# Altium PCB PCB2.PcbDoc
Units mil, origin at the board's own origin, x right, y up, seen from the top; angles counter-clockwise.
Board outline 11815 x 4930 mil, 2 copper layers (Top Layer, Bottom Layer); 72 components, 38 nets, 176 pads, 4 vias.
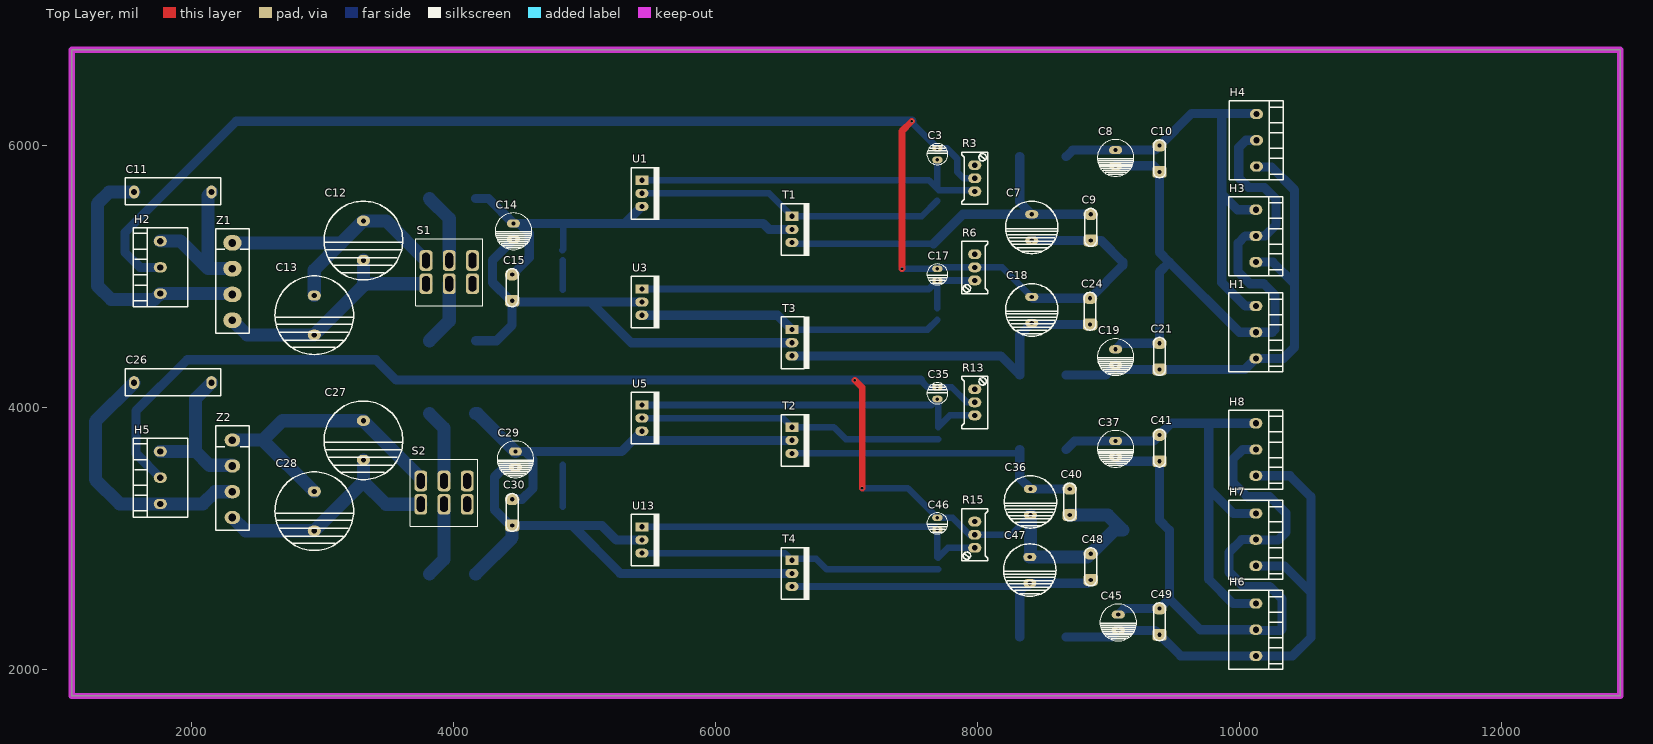
[diagram p0: Top Layer view]
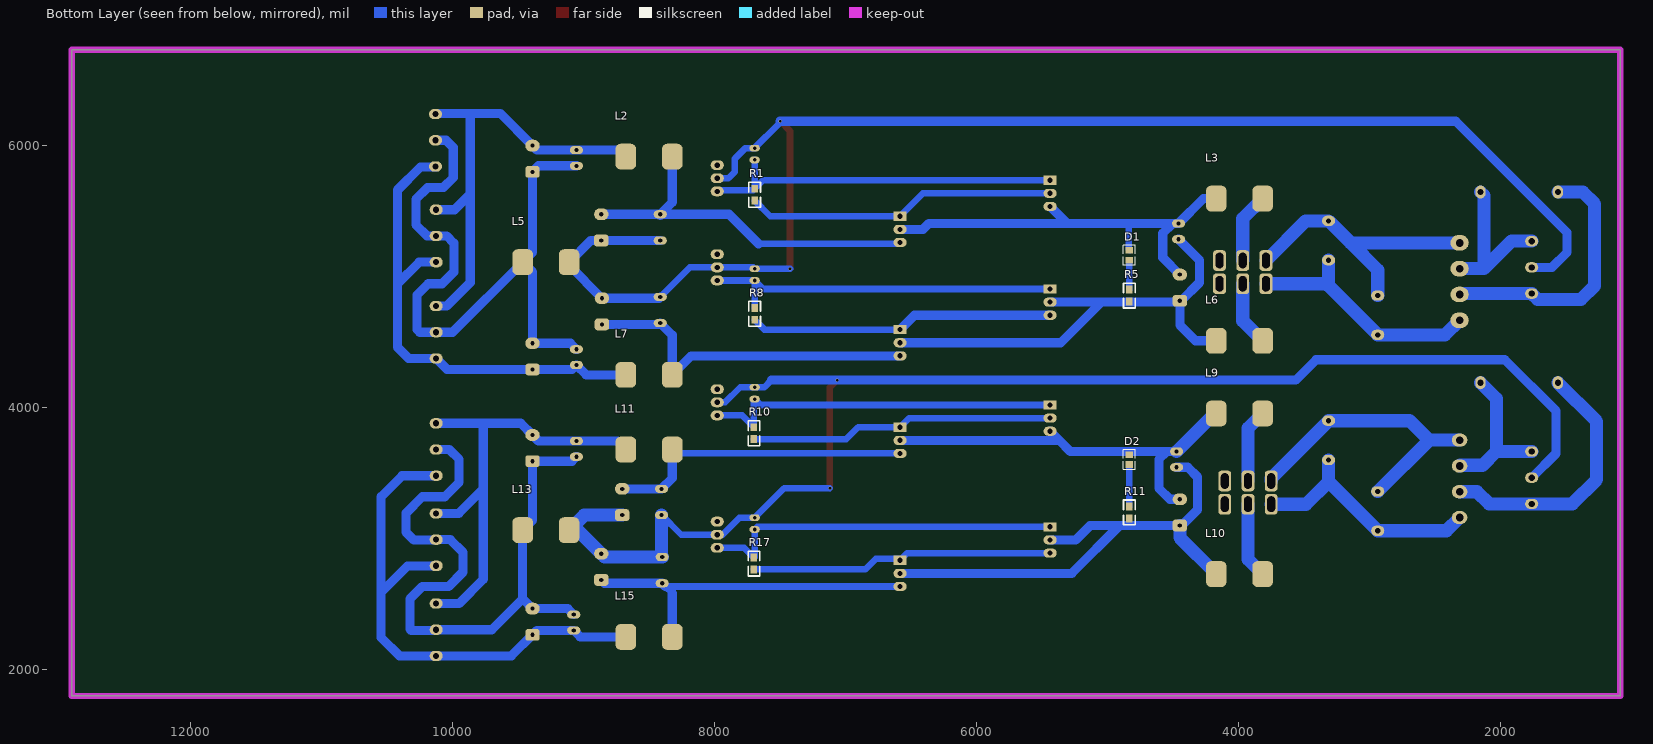
[diagram p1: Bottom Layer view, seen from below]

## Layer stack, top to bottom
Top Solder: solder mask 0.4, Solder Resist, Dk 3.5
Top Layer: signal copper 1.4
Dielectric 1: dielectric 12.6, FR-4, Dk 4.8
Bottom Layer: signal copper 1.4
Bottom Solder: solder mask 0.4, Solder Resist, Dk 3.5

## Board outline
1090,1800 1090,6730 12905,6730 12905,1800

## Design rules (kind name [scope] priority, off if disabled: settings)
Clearance [All] p1: gap=10
PolygonConnect [All] p1: connectstyle=Relief reliefconductorwidth=10 reliefentries=4 polygonreliefangle="90 Angle" airgapwidth=10
RoutingVias [All] p1: holewidth=28 width=50 viastyle="Through Hole" minholewidth=28 minwidth=50 maxholewidth=28 maxwidth=50
SolderMaskExpansion [All] p1: expansion=4
Width [All] p1: maxlimit=100 minlimit=10 preferedwidth=10
30 further rules are at their usual default settings.

## Components (designator, comment, footprint, x,y, rotation, side; value= is the part's Value field where it differs from the comment)
C3 "Cap-AL" CD-2.2mm 7695,5890 r270 top
C7 "470uf" CD-5mm 8415,5475 r90 top
C8 "22uf" CD-3mm 9055,5965 r90 top
C9 "Cap-SEMI" 独石电容 8865,5275 r0 top
C10 "Cap-SEMI" 独石电容 9390,5799 r0 top
C11 "Cap1" 安规电容 1565,5645 r270 top
C12 "2200uf" CD-7.6mm 3315,5425 r90 top
C13 "2200uf" CD-7.6mm 2940,4855 r90 top
C14 "Cap-AL" CD-3mm 4460,5405 r90 top
C15 "0.1uf" 独石电容 4450,4815 r0 top
C17 "Cap-AL" CD-2.2mm 7695,5060 r90 top
C18 "470uf" CD-5mm 8415,4845 r90 top
C19 "22uf" CD-3mm 9055,4445 r90 top
C21 "Cap-SEMI" 独石电容 9390,4291 r0 top
C24 "Cap-SEMI" 独石电容 8860,4635 r0 top
C26 "Cap1" 安规电容 1565,4190 r270 top
C27 "2200uf" CD-7.6mm 3315,3900 r90 top
C28 "2200uf" CD-7.6mm 2940,3360 r90 top
C29 "Cap-AL" CD-3mm 4475,3665 r90 top
C30 "0.1uf" 独石电容 4450,3100 r0 top
C35 "Cap-AL" CD-2.2mm 7695,4065 r270 top
C36 "470uf" CD-5mm 8405,3380 r90 top
C37 "22uf" CD-3mm 9055,3745 r90 top
C40 "Cap-SEMI" 独石电容 8705,3180 r0 top
C41 "Cap-SEMI" 独石电容 9390,3591 r0 top
C45 "22uf" CD-3mm 9075,2420 r90 top
C46 "Cap-AL" CD-2.2mm 7695,3160 r90 top
C47 "470uf" CD-5mm 8400,2860 r90 top
C48 "Cap-SEMI" 独石电容 8865,2685 r0 top
C49 "Cap-SEMI" 独石电容 9390,2266 r0 top
D1 "LED" 0805_s 4823.22,5141.73 r270 bottom
D2 "LED" 0805_s 4823.22,3581.93 r270 bottom
H1 "KF128-5.08-3P" KF128-5.08-3P 10125,4775 r90 top
H2 "KF128-5.08-3P" KF128-5.08-3P 1765,4870 r270 top
H3 "KF128-5.08-3P" KF128-5.08-3P 10125,5510 r90 top
H4 "KF128-5.08-3P" KF128-5.08-3P 10130,6240 r90 top
H5 "KF128-5.08-3P" KF128-5.08-3P 1765,3265 r270 top
H6 "KF128-5.08-3P" KF128-5.08-3P 10125,2505 r90 top
H7 "KF128-5.08-3P" KF128-5.08-3P 10125,3192.5 r90 top
H8 "KF128-5.08-3P" KF128-5.08-3P 10125,3880 r90 top
L2 "SMD" "功率电感-12x12 - duplicate" 8500,5915 r0 bottom
L3 "SMD" "功率电感-12x12 - duplicate" 3995,5595 r0 bottom
L5 "SMD" "功率电感-12x12 - duplicate" 9287.83,5110 r0 bottom
L6 "SMD" "功率电感-12x12 - duplicate" 3995,4510 r0 bottom
L7 "SMD" "功率电感-12x12 - duplicate" 8500,4250 r0 bottom
L9 "SMD" "功率电感-12x12 - duplicate" 3995,3955 r0 bottom
L10 "SMD" "功率电感-12x12 - duplicate" 3995,2730 r0 bottom
L11 "SMD" "功率电感-12x12 - duplicate" 8500,3680 r0 bottom
L13 "SMD" "功率电感-12x12 - duplicate" 9287.83,3065 r0 bottom
L15 "SMD" "功率电感-12x12 - duplicate" 8500,2250 r0 bottom
R1 "RES" 0805 7695,5670 r270 bottom
R3 "可调电位器1" 电位器 7980,5850 r270 top
R5 "RES" 0805 4835,4810 r90 bottom
R6 "可调电位器1" 电位器 7980,4970 r90 top
R8 "RES" 0805 7695,4670 r90 bottom
R10 "RES" 0805 7700,3850 r270 bottom
R11 "RES" 0805 4835,3155 r90 bottom
R13 "可调电位器1" 电位器 7980,4140 r270 top
R15 "可调电位器1" 电位器 7980,2930 r90 top
R17 "RES" 0805 7700,2765 r90 bottom
S1 "双掷开关" SWITCH 3792.83,5122.17 r0 top
S2 "双掷开关" SWITCH 4107.17,3262.83 r180 top
T1 "TIP41" TO-220 6585,5460 r270 top
T2 "TIP41" TO-220 6585,3850 r270 top
T3 "TIP42" TO-220 6585,4595 r270 top
T4 "TIP42" TO-220 6585,2835 r270 top
U1 "LM317" TO-220 5440,5735 r270 top
U3 "LM337" TO-220 5440,4905 r270 top
U5 "LM317" TO-220 5440,4020 r270 top
U13 "LM337" TO-220 5440,3090 r270 top
Z1 "整流桥" 整流桥#1 2315,5256.85 r0 top
Z2 "整流桥" 整流桥#2 2315,3751.85 r0 top

## Footprints (in the part's own frame and the unit in brackets; to place one, negate y for a bottom-side part, rotate by r counter-clockwise, add the part's x,y. Pads: shape width x height; smd on the part's side, far side on the other; paste and mask are expansions set on the pad)
0805 [mil]
  rect 60x50 smd: 1(0,0) 2(90,0)
  silkscreen extent -50,-45 140,45
0805_s [mm]
  rect 1.3x1.499 smd: 1(0.425,-0.35) 2(-1.475,-0.35)
  silkscreen extent -2.47,-1.49 1.43,0.79
CD-2.2mm [mm]
  oval 1.3x2.032 hole 0.7: 1(0,0) 2(-2.286,0)
  silkscreen extent -3.16,-2.04 0.92,2.04
CD-3mm [mil]
  oval 62x100 hole 31.5: 1(0,0) 2(-120,0)
  silkscreen extent -200,-140 80,140
CD-5mm [mil]
  oval 62x100 hole 31.5: 1(0,0) 2(-200,0)
  silkscreen extent -300,-200 100,200
CD-7.6mm [mm]
  oval 2x2.54 hole 1: 1(0,0) 2(-7.62,0)
  silkscreen extent -11.43,-7.62 3.81,7.62
KF128-5.08-3P [mm]
  oval 2x2.54 hole 1.2: 1(0,0) 2(-5.08,0) 3(-10.16,0)
  silkscreen extent -12.76,-5.2 2.54,5.3, body extent -12.66,-5.1 2.34,5.2, height 14.1
SWITCH [mm]
  rrect50% 2.5x4 hole 1.5 slot 3 at 90 deg: 1(0,0) 2(4.5,0) 3(9,0) 4(9,-4.5) 5(4.5,-4.5) 6(0,-4.5)
  silkscreen extent -2,-8.75 11,4.25, body extent -1.85,-8.18 10.85,3.63, height 30.58
TO-220 [mil]
  rect 70x100 hole 40: 1(0,0)
  oval 70x100 hole 40: 2(100,0) 3(200,0)
  silkscreen extent -102,-80 302,135
"功率电感-12x12 - duplicate" [mm]
  rrect50% 4x5 smd: 1(-4.5,0) 2(4.5,0)
  body extent -6.08,-6.15 6.21,6.15, height 8
安规电容 [mm]
  oval 2.54x2 hole 1.2: 1(0,0) 2(0,15)
  silkscreen extent -2.75,-1.75 2.5,16.75, body extent -2.75,-1.75 2.6,16.75, height 13
整流桥#1 [mm]
  oval 3.556x3 hole 1.5: 1(0,0) 2(0,-5) 3(0,-10) 4(0,-15)
  silkscreen extent -3.25,-17.5 3.25,2.75
整流桥#2 [mm]
  oval 3x2.54 hole 1.5: 1(0,0) 2(0,-5) 3(0,-10) 4(0,-15)
  silkscreen extent -3.25,-17.5 3.25,2.75
独石电容 [mil]
  rrect50% 110x90 hole 32: 1(0,0)
  oval 110x90 hole 32: 2(0,200)
  silkscreen extent -45,-45 45,245, body extent -77,-18 73,218, height 335
电位器 [mil]
  oval 75x100 hole 40: 1(0,0) 2(100,0) 3(200,0)
  silkscreen extent -100,-100 300,100

## Part data
C7 C8 C18 C19 C36 C37 C45 C47: library part Cap-AL
C12 C13 C27 C28: library part Cap
C15 C30: library part Cap-SEMI
L2 L3 L5 L6 L7 L9 L10 L11 L13 L15: library part 功率电感

## Via types
v1: diameter 24, hole 20, Top Layer to Bottom Layer, 4 vias

## Nets (pads, with @x,y where several pads share a name; then routed paths per layer and width w, separated by ;. In a path a pad name is that pad's centre, name@x,y a point inside that pad or via, vN(x,y) a via of type N, cw(c..) or ccw(c..) an arc to the next point about the centre after c; other vN are vias at no path point)
GND1: C3.2 C7.2 C9.1 C17.1 C18.1 C24.2 H2.2 L5.1 R3.2 R6.2 | length 11363.1
  Top Layer w50: v1(7425,5060) 7425,6110 v1(7500,6185)
  Bottom Layer w50: v1(7425,5060) C17.1 7705,5070 R6.2 8190,5070 C18.1 ; 7510,6165 C3.2 7765,5980 7845,5900 7845,5800 7895,5750 R3.2 R3.2@7982.53,5750
  Bottom Layer w70: H2.2 1610,5070 1495,5185 1495,5335 2345,6185 v1(7500,6185) ; C18.1 8425,4835 C24.2 9110.67,5085.67 L5.1 8945.67,5275 C9.1 C7.2
GND2: C35.2 C36.2 C40.1 C46.1 C47.1 C48.2 H5.2 L13.1 R13.2 R15.2 | length 11195.7
  Top Layer w50: v1(7065,4210) 7120,4155 v1(7120,3385)
  Bottom Layer w50: v1(7120,3385) 7470,3385 C46.1 7810,3160 7940,3030 R15.2 8255,3030 C36.2 ; 7565,4210 7620,4155 C35.2 7805,4155 7920,4040 R13.2
  Bottom Layer w70: H5.2 1580,3650 1580,3975 1970,4365 3410,4365 3565,4210 v1(7065,4210) 7565,4210
  Bottom Layer w100: C36.2 8405,2865 C47.1 8840,2860 C48.2 9045,3065 L13.1 8995.67,3180 C40.1
GND-HIGH_ADJ: C8.2 C10.1 C19.1 C21.2 H1.2 H3.2 H4.2 L5.2 | length 5234.7
  Bottom Layer w70: C19.1 9101,4491 C21.2 9390,5035 L5.2 ; C8.2 9344,5845 C10.1 9390,5185 L5.2 ; H4.2 10050,6040 9995,5985 9995,5755 10070,5680 10190,5680 10280,5590 10280,5395 10195,5310 H3.2 10045,5310 9990,5255 9990,5035 10080,4945 10185,4945 10270,4860 10270,4595 10250,4575 H1.2 10000,4575 L5.2
NetC3_1: C3.1 R1.1 R3.3 U1.1 | length 2776.9
  Bottom Layer w50: U1.1 7630,5735 R1.1 7705,5660 7970,5660 R3.3 ; R1.1@7695,5688.31 C3.1
NetC7_1: C7.1 C9.2 L2.1 T1.3 | length 2863.8
  Bottom Layer w50: T1.3 6595,5250 7665,5250
  Bottom Layer w70: 7665,5250 7890,5475 8405,5475 8415,5465 8425,5475 C9.2 ; L2.1 8322.83,5567.17 C7.1
NetC8_1: C8.1 C10.2 H1.1 H3.1 H4.1 L2.2 | length 3518.8
  Bottom Layer w70: L2.2 8727.17,5965 C8.1 9356,5965 C10.2 9636,6245 9865,6245 ; H1.1 10045,4775 9865,4955 9865,5630 ; H3.1 9985,5510 9865,5630 ; H4.1@10125,6245 9865,6245 ; 9865,5630 9865,6245
NetC11_1: C11.1 H2.1 Z1.3 | length 2037.2
  Bottom Layer w100: C11.1 1375,5645 1285,5555 1285,4930 1390,4825 1720,4825 H2.1 2308.15,4870 Z1.3
NetC11_2: C11.2 H2.3 Z1.2 | length 1232.6
  Bottom Layer w100: H2.3 1920,5270 2130,5060 ; C11.2 2130,5619.45 2130,5060 ; Z1.2 2130,5060
NetC12_1: C12.1 C13.1 S1.1 Z1.1 | length 2160.5
  Bottom Layer w100: Z1.1 3146.85,5256.85 ; C13.1 2940,5050 3146.85,5256.85 ; S1.1 3490,5425 C12.1 3146.85,5256.85
NetC12_2: C12.2 C13.2 S1.6 Z1.4 | length 1880.5
  Bottom Layer w100: Z1.4 2426.3,4555 C13.2 3315,4930 ; C12.2 3315,4930 ; S1.6 3330,4945 3315,4930
NetC17_2: C17.2 R6.1 R8.2 U3.1 | length 2776.9
  Bottom Layer w50: U3.1 7630,4905 C17.2 ; R8.2 C17.2 ; R6.1 C17.2
NetC18_2: C18.2 C24.1 L7.1 T3.3 | length 2680.2
  Bottom Layer w70: T3.3 8177.83,4395 L7.1 8322.83,4552.83 C18.2 8425,4635 C24.1
NetC19_2: C19.2 C21.1 H1.3 H3.3 H4.3 L7.2 | length 3788.8
  Bottom Layer w70: L7.2 8980,4250 C19.2 9089,4291 C21.1 10041,4291 H1.3 10335,4375 10420,4460 10420,4945 ; H3.3 10255,5110 10420,4945 ; H4.3@10125,5835 10245,5835 10420,5660 10420,4945
NetC26_1: C26.1 H5.1 Z2.3 | length 2022.4
  Bottom Layer w100: C26.1 1270,3895 1270,3450 1455,3265 H5.1 2090,3265 2183.15,3358.15 Z2.3
NetC26_2: C26.2 H5.3 Z2.2 | length 1170.5
  Bottom Layer w100: H5.3 2035,3665 ; C26.2 2035,4069.45 2035,3665 ; Z2.2 2310,3560 2140,3560 2035,3665
NetC27_1: C27.1 C28.1 S2.4 Z2.1 | length 2256.9
  Bottom Layer w100: Z2.1 2548.15,3751.85 ; C28.1 2548.15,3751.85 ; S2.4 3752.83,3462.17 C27.1 2696.3,3900 2548.15,3751.85
NetC27_2: C27.2 C28.2 S2.3 Z2.4 | length 1871.4
  Bottom Layer w100: Z2.4 2416.3,3060 C28.2 3315,3435 ; C27.2 3315,3435 ; S2.3 3487.17,3262.83 3315,3435
NetC35_1: C35.1 R10.1 R13.3 U5.1 | length 2808
  Bottom Layer w50: U5.1 7650,4020 C35.1 7700,4060 R10.1 7790,3940 R13.3
NetC36_1: C36.1 C40.2 L11.1 T2.3 | length 2384.3
  Bottom Layer w50: T2.3 8292.83,3650 L11.1
  Bottom Layer w70: L11.1 8322.83,3462.17 C36.1 C40.2
NetC37_1: C37.1 C41.2 H6.1 H7.1 H8.1 L11.2 | length 3595
  Bottom Layer w70: L11.2 8742.17,3745 C37.1 9344,3745 C41.2 9479,3880 9765,3880 ; H6.1 9950,2505 9765,2690 9765,3380 ; H7.1 9952.5,3192.5 9765,3380 ; H8.1 9765,3880 ; 9765,3380 9765,3880
NetC37_2: C37.2 C41.1 C45.1 C49.2 H6.2 H7.2 H8.2 L13.2 | length 5233.8
  Bottom Layer w70: C37.2 9089,3591 C41.1 9390,3140 L13.2 9465,2541 ; C45.1 9121,2466 C49.2 9465,2541 ; H8.2 10025,3680 9950,3605 9950,3430 10060,3320 10230,3320 10355,3195 10355,3050 10295,2990 10127.5,2990 H7.2 10017.5,2992.5 9920,2895 9920,2745 10030,2635 10230,2635 10325,2540 10325,2310 10315,2300 10130,2300 H6.2 9701,2305 9465,2541
NetC45_2: C45.2 C49.1 H6.3 H7.3 H8.3 L15.2 | length 4092.5
  Bottom Layer w70: L15.2 9025,2250 C45.2 9356,2300 C49.1 9551,2105 H6.3 10405,2105 10545,2245 10545,2590 ; H7.3 10342.5,2792.5 10545,2590 ; H8.3 10385,3480 10545,3320 10545,2590
NetC46_2: C46.2 R15.1 R17.2 U13.1 | length 2791.4
  Bottom Layer w50: U13.1 7675,3090 C46.2 7695,2860 R17.2 7775,2930 R15.1
NetC47_2: C47.2 C48.1 L15.1 T4.3 | length 2707.3
  Bottom Layer w50: T4.3 8375,2635 8322.83,2582.83
  Bottom Layer w70: L15.1 8322.83,2582.83 ; C47.2@8375,2635 C47.2 8840,2660 C48.1
NetD1_1: D1.1 R5.2 | length 225.8
  Bottom Layer w50: R5.2 4837,4902 D1.1
NetD2_1: D2.1 R11.2 | length 321
  Bottom Layer w50: R11.2 4835,3310 4837,3312 D2.1
NetL3_1: L3.1 S1.2 | length 535.9
  Bottom Layer w100: L3.1 3970,5442.83 S1.2
NetL6_1: L6.1 S1.5 | length 498
  Bottom Layer w100: L6.1 3970,4662.17 S1.5
NetL9_1: L9.1 S2.5 | length 561.5
  Bottom Layer w100: L9.1 3930,3842.83 S2.5
NetL10_1: L10.1 S2.2 | length 579.3
  Bottom Layer w100: L10.1 3930,2842.17 S2.2
NetR1_2: R1.2 T1.1 U1.2 | length 2377.2
  Bottom Layer w50: U1.2 6410,5635 T1.1 7575,5460 R1.2
NetR8_1: R8.1 T3.1 U3.3 | length 2331.6
  Bottom Layer w50: T3.1 7620,4595 R8.1
  Bottom Layer w70: U3.3 6475,4705 T3.1
NetR10_2: R10.2 T2.1 U5.2 | length 2326.3
  Bottom Layer w50: U5.2 6515,3920 T2.1 6905,3850 6995,3760 R10.2
NetR17_1: R17.1 T4.1 U13.3 | length 2320.1
  Bottom Layer w50: U13.3 6530,2890 T4.1 6595,2845 6770,2845 6850,2765 R17.1
POW1+: C14.1 C15.2 D1.2 L3.2 T1.2 U1.3 | length 3381.2
  Bottom Layer w50: 4830,5405 4840,5395 4840,5206.8 D1.2@4833,5199.8
  Bottom Layer w70: L3.2 4270,5595 C14.1 C14.1@4505,5405 ; C15.2 4580,5145 4580,5330 C14.1@4505,5405 ; U1.3 5310,5405 ; T1.2 6410,5360 6365,5405 5310,5405 ; C14.1@4505,5405 4830,5405 5310,5405
POW1-: C14.2 C15.1 L6.2 R5.1 T3.2 U3.2 | length 3774.4
  Bottom Layer w70: L6.2 4330,4510 4450,4630 C15.1 ; C14.2 4300,5125 4300,4955 4440,4815 C15.1 ; U3.2 5050,4805 ; T3.2 5360,4495 5050,4805 ; C15.1 4460,4805 5050,4805
POW2+: C29.1 C30.2 D2.2 L9.2 T2.2 U5.3 | length 3167.2
  Bottom Layer w70: C30.2 4525,3300 4610,3385 4610,3605 4550,3665 ; C29.1 4550,3665 ; U5.3 5370,3750 ; T2.2 5370,3750 ; 4550,3665 5285,3665 5370,3750
  Bottom Layer w100: L9.2 4185,3955 C29.1
POW2-: C29.2 C30.1 L10.2 R11.1 T4.2 U13.2 | length 3972.6
  Bottom Layer w70: C29.2 4390,3545 4315,3470 4315,3220 4435,3100 C30.1 4910,3100 ; U13.2 5245,2990 5135,3100 4910,3100 ; T4.2 5275,2735 4910,3100
  Bottom Layer w100: L10.2 4450,3007.83 C30.1
pads on no net: R3.1 R6.3 R13.1 R15.3 S1.3 S1.4 S2.1 S2.6

## Keep-outs
Keep-Out Layer:
  the board outline again, w47.24